# Altium PCB Task_PCB.PcbDoc
Units mm, origin at the board's own origin, x right, y up, seen from the top; angles counter-clockwise.
Board outline 69.98 x 20.07 mm, 2 copper layers (Top Layer, Bottom Layer); 9 components, 13 nets, 79 pads, 13 vias.
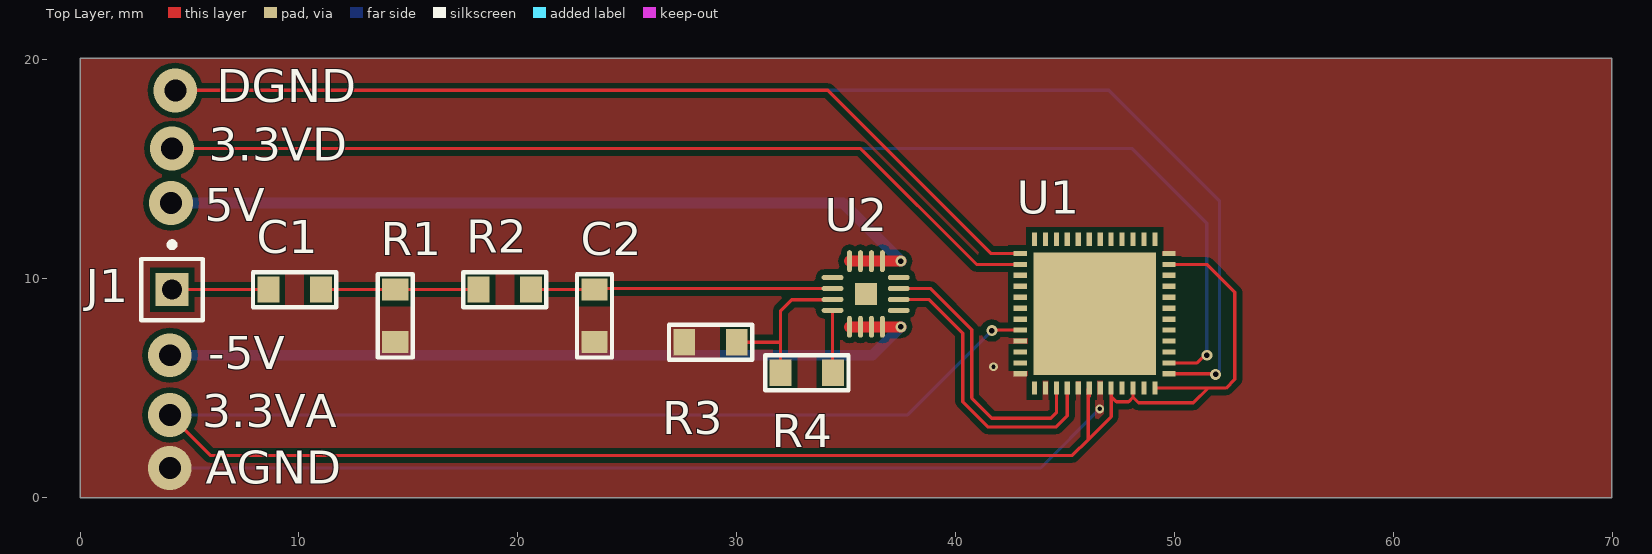
[diagram p0: Top Layer view]
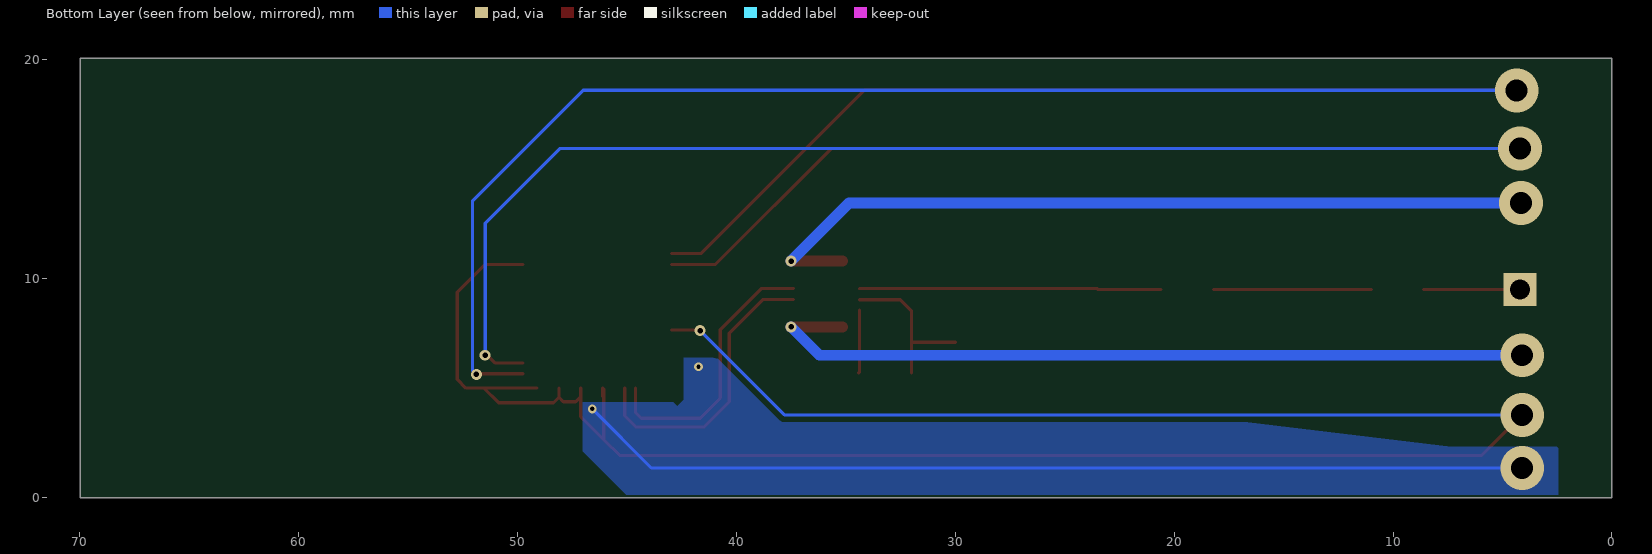
[diagram p1: Bottom Layer view, seen from below]

## Layer stack, top to bottom
Top Solder: solder mask 0.0102, Solder Resist, Dk 3.5
Top Layer: signal copper 0.0356
Dielectric 1: dielectric 0.32, FR-4, Dk 4.8
Bottom Layer: signal copper 0.0356
Bottom Solder: solder mask 0.0102, Solder Resist, Dk 3.5

## Board outline
0,0 69.977,0 69.977,20.066 0,20.066

## Design rules (kind name [scope] priority, off if disabled: settings)
Clearance [All] p1: gap=0.254 ignorepadtopadclearanceinfootprint=FALSE except(0: Arc-Hole Track-Hole SMDPad-Hole THPad-Hole Via-Hole Fill-Hole Poly-Hole Region-Hole Text-Hole)
PolygonConnect PolygonConnect_1 [All] p1: connectstyle=Direct reliefconductorwidth=0.254 reliefentries=4 polygonreliefangle="90 Angle" airgapwidth=0.254
PolygonConnect [All] p2: connectstyle=Relief reliefconductorwidth=0.254 reliefentries=4 polygonreliefangle="90 Angle" airgapwidth=0.254
RoomDefinition Task_sch [InComponentClass('Task_sch')] p1: confinementstyle=ConfineIn formatcopy=TRUE lockcomponents=FALSE outline 153.543,1.524 213.995,1.524 213.995,11.557 153.543,11.557
RoutingVias [All] p1: holewidth=0.711 width=1.27 viastyle="Through Hole" minholewidth=0.711 minwidth=1.27 maxholewidth=0.711 maxwidth=1.27
SolderMaskExpansion [All] p1: expansion=0.102
Width [All] p1: maxlimit=1 minlimit=0.1 preferedwidth=0.15 minimp=50.000000 maximp=50.000000 favimp=50.000000
30 further rules are at their usual default settings.

## Components (designator, comment, footprint, x,y, rotation, side; value= is the part's Value field where it differs from the comment)
C1 "Cap" 0805 8.6,9.5 r0 top value=16u
C2 "Cap" 0805 23.5,7.1 r90 top value=5u
J1 "Socket" PIN1 4.2,9.5 r0 top
R1 "Res" 0805 14.4,7.1 r90 top value=1K
R2 "Res" 0805 20.6,9.5 r180 top value=1K
R3 "Res" 0805 30,7.1 r180 top value=1K
R4 "Res" 0805 34.4,5.7 r180 top value=1K
U1 "ADS61B49" ADS61B49 42.95,11.15 r0 top
U2 "ADA4932-1" ADA4932-1 34.275,10.05 r0 top

## Footprints (in the part's own frame and the unit in brackets; to place one, negate y for a bottom-side part, rotate by r counter-clockwise, add the part's x,y. Pads: shape width x height; smd on the part's side, far side on the other; paste and mask are expansions set on the pad)
0805 [mm]
  rect 1x1.2 smd: 1(0,0) 2(2.4,0)
  silkscreen extent -0.7,-0.8 3.1,0.8
ADA4932-1 [mm]
  oval 1x0.23 smd: 1(0.1,0) 2(0.1,-0.5) 3(0.1,-1) 4(0.1,-1.5) 9(3.125,-1.5) 10(3.125,-1) 11(3.125,-0.5) 12(3.125,0)
  oval 0.23x1 smd: 5(0.875,-2.25) 6(1.375,-2.25) 7(1.875,-2.25) 8(2.375,-2.25) 13(2.375,0.75) 14(1.875,0.75) 15(1.375,0.75) 16(0.875,0.75)
  rect 1x1 smd: ""(1.625,-0.75)
ADS61B49 [mm]
  rect 0.6x0.24 smd: 1(0,0) 2(0,-0.5) 3(0,-1) 4(0,-1.5) 5(0,-2) 6(0,-2.5) 7(0,-3) 8(0,-3.5) 9(0,-4) 10(0,-4.5) 11(0,-5) 12(0,-5.5) 25(6.8,0) 26(6.8,-0.5) 27(6.8,-1) 28(6.8,-1.5) 29(6.8,-2) 30(6.8,-2.5) 31(6.8,-3) 32(6.8,-3.5) 33(6.8,-4) 34(6.8,-4.5) 35(6.8,-5) 36(6.8,-5.5)
  rect 0.24x0.6 smd: 13(0.65,-6.15) 14(1.15,-6.15) 15(1.65,-6.15) 16(2.15,-6.15) 17(2.65,-6.15) 18(3.15,-6.15) 19(3.65,-6.15) 20(4.15,-6.15) 21(4.65,-6.15) 22(5.15,-6.15) 23(5.65,-6.15) 24(6.15,-6.15) 37(6.15,0.65) 38(5.65,0.65) 39(5.15,0.65) 40(4.65,0.65) 41(4.15,0.65) 42(3.65,0.65) 43(3.15,0.65) 44(2.65,0.65) 45(2.15,0.65) 46(1.65,0.65) 47(1.15,0.65) 48(0.65,0.65)
  rect 5.6x5.6 smd: 49(3.4,-2.75)
PIN1 [mm] "Connector; Plug"
  rect 1.5x1.5 hole 0.9: 1(0,0)
  silkscreen extent -1.4,-1.4 1.4,2.17

## Part data
J1: LatestRevisionDate=17-Jul-2002, LatestRevisionNote="Re-released for DXP Platform.", Publisher="Altium Limited"

## Via types
v1: diameter 2, hole 1, Top Layer to Bottom Layer, 6 vias
v2: diameter 0.5, hole 0.25, Top Layer to Bottom Layer, 5 vias
v3: diameter 0.4, hole 0.2, Top Layer to Bottom Layer, 2 vias

## Nets (pads, with @x,y where several pads share a name; then routed paths per layer and width w, separated by ;. In a path a pad name is that pad's centre, name@x,y a point inside that pad or via, vN(x,y) a via of type N, cw(c..) or ccw(c..) an arc to the next point about the centre after c; other vN are vias at no path point)
3.3VA: U1.8 U1.18 U1.20 U1.22 U1.24 U1.26 | length 105.8
  Top Layer w0.15: v1(4.1,3.775) 5.95,1.925 45.325,1.925 46.049,2.649 ; v2(41.65,7.625) 41.675,7.65 U1.8 ; 46.1,4.615 U1.18 46.049,4.949 46.049,2.649 ; U1.20 47.1,4.615 ; U1.22 48.1,4.575 ; U1.24 51.525,5 ; U1.26 51.475,10.65 52.75,9.375 52.75,5.4 52.35,5 51.525,5 ; 46.049,2.649 47.1,3.7 47.1,4.615 ; 47.1,4.615 47.344,4.371 47.896,4.371 48.1,4.575 ; 48.1,4.575 48.35,4.325 50.85,4.325 51.525,5
  Bottom Layer w0.15: v1(4.1,3.775) 37.8,3.775 v2(41.65,7.625)
3.3VD: U1.2 U1.35 | length 97.5
  Top Layer w0.15: v1(4.2,15.95) 35.65,15.95 40.95,10.65 U1.2 ; U1.35 51.025,6.15 51.375,6.5 v2(51.475,6.5)
  Bottom Layer w0.15: v1(4.2,15.95) 48.05,15.95 51.475,12.525 v2(51.475,6.5)
5V: U2.13 U2.14 U2.15 U2.16 | length 36.8
  Top Layer w0.5: U2.16 U2.15 U2.14 U2.13 v2(37.5,10.8)
  Bottom Layer w0.5: v1(4.15,13.45) 34.85,13.45 v2(37.5,10.8)
-5V: U2.5 U2.6 U2.7 U2.8 | length 36.3
  Top Layer w0.5: U2.5 U2.6 U2.7 U2.8 v2(37.5,7.8)
  Bottom Layer w0.5: v1(4.1,6.5) 36.2,6.5 v2(37.5,7.8)
AGND: C2.1 R1.1 R3.2 U1.9 U1.12 U1.14 U1.17 U1.19 U1.25 | length 43.6
  Bottom Layer w0.15: v1(4.1,1.35) 43.875,1.35 v3(46.575,4.05)
  other v3: 41.725,5.975
DGND: U1.1 U1.36 | length 101.6
  Top Layer w0.15: v1(4.35,18.6) 34.15,18.6 41.6,11.15 U1.1 ; U1.36 v2@51.875,5.65
  Bottom Layer w0.15: v1(4.35,18.6) 47,18.6 52.054,13.546 52.054,5.804 v2(51.875,5.625)
NetC1_1: C1.1 J1.1 | length 4.4
  Top Layer w0.15: J1.1 C1.1
NetC1_2: C1.2 R1.2 R2.2 | length 7.2
  Top Layer w0.15: C1.2 R1.2 R2.2
NetC2_2: C2.2 R2.1 U2.2 | length 13.8
  Top Layer w0.15: R2.1 C2.2 23.5,9.546 34.371,9.546 U2.2
NetR3_1: R3.1 R4.2 U2.3 | length 7.4
  Top Layer w0.15: R3.1 32,7.1 ; R4.2 32,7.1 ; U2.3@34.375,9.038 32.5,9.038 32,8.538 32,7.1
NetR4_1: R4.1 U2.4 | length 2.9
  Top Layer w0.15: U2.4 34.375,5.725 R4.1
OUTPUT+: U1.16 U2.10 | length 13.4
  Top Layer w0.15: U2.10 38.775,9.05 40.325,7.5 40.325,4.375 41.479,3.221 44.579,3.221 45.1,3.742 U1.16
OUTPUT-: U1.15 U2.11 | length 12.7
  Top Layer w0.15: U2.11 37.404,9.554 38.842,9.554 40.729,7.667 40.729,4.546 41.65,3.625 44.35,3.625 44.6,3.875 U1.15
pads on no net: U1.3 U1.4 U1.5 U1.6 U1.7 U1.10 U1.11 U1.13 U1.21 U1.23 U1.27 U1.28 U1.29 U1.30 U1.31 U1.32 U1.33 U1.34 U1.37 U1.38 U1.39 U1.40 U1.41 U1.42 U1.43 U1.44 U1.45 U1.46 U1.47 U1.48 U1.49 U2. U2.1 U2.9 U2.12

## Polygon pours and split planes (outlines as drawn)
AGND on Top Layer "AGND_L01_P002" (solid, remove dead copper, pour order 2): 0,20.075 69.975,20.075 69.975,0 0,0
AGND on Bottom Layer "AGND_L02_P004" (solid, remove dead copper, pour order 4): 41.05,6.375 42.4,6.375 42.4,4.475 42.7,4.175 42.875,4.35 47.025,4.35 47.025,2.125 45.025,0.125 2.45,0.125 2.45,2.25 2.525,2.325 7.35,2.325

## Silkscreen, mask and mechanical layers (free items; w line width, h text height)
Top Overlay:
  text "DGND" at 6.25,18.05 h1.52
  text "3.3VD" at 5.875,15.375 h1.52
  text "5V" at 5.7,12.625 h1.52
  text "-5V" at 5.85,5.85 h1.52
  text "3.3VA" at 5.575,3.2 h1.52
  text "AGND" at 5.75,0.625 h1.52